# EAGLE board untitled (EAGLE 9.6.1)
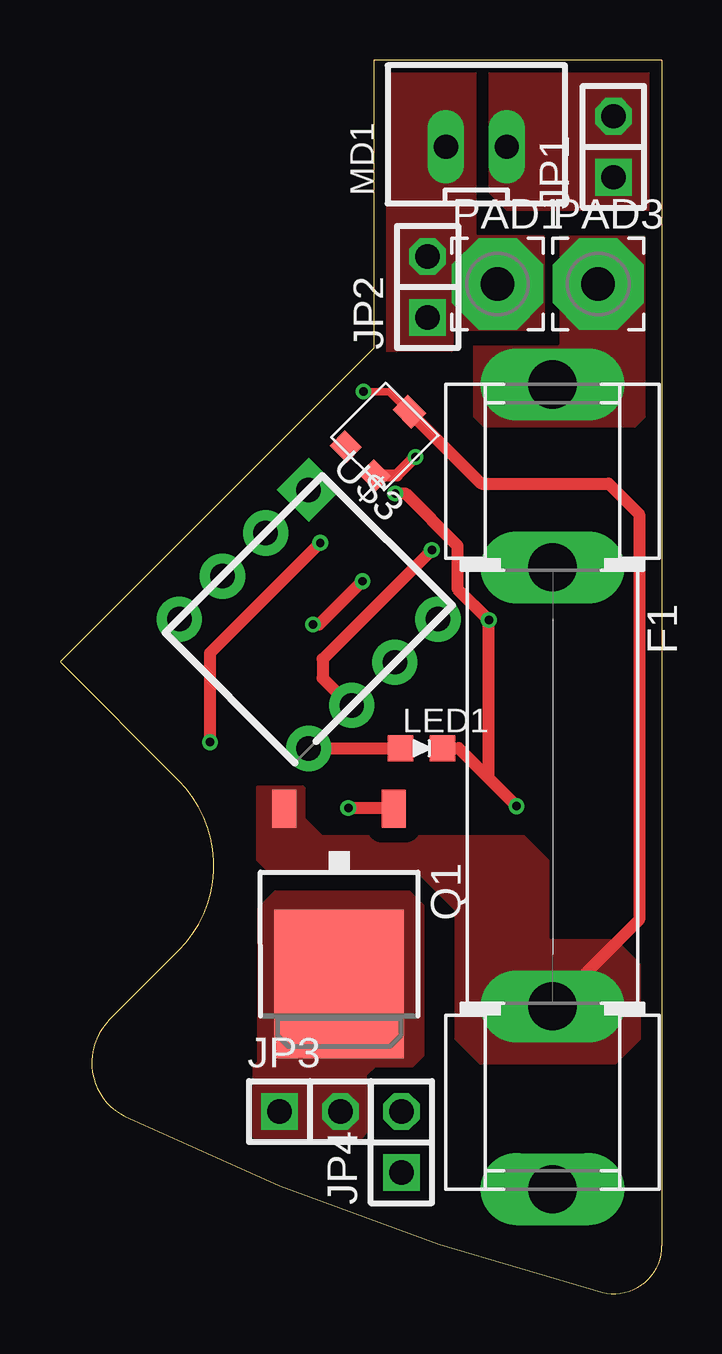
[diagram p0: board, top side]
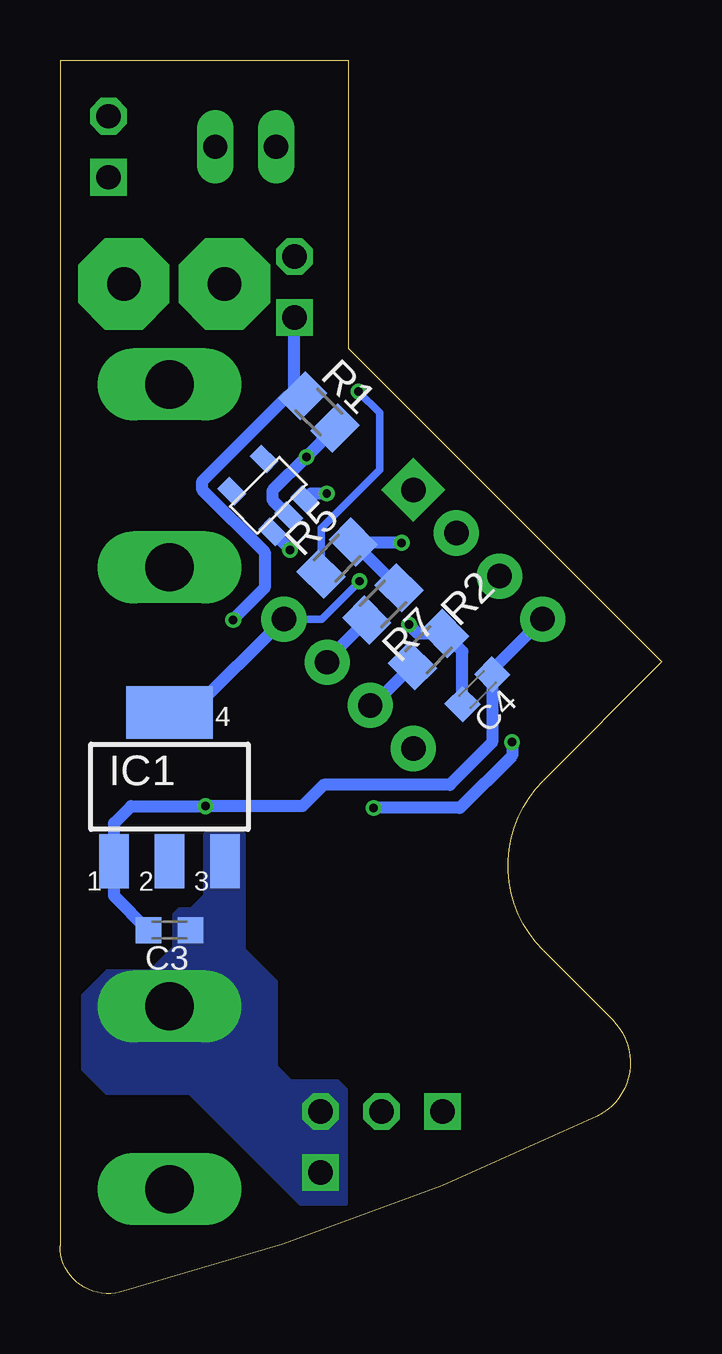
[diagram p1: board, bottom side, seen from below]

Size 25.08 x 51.4 mm. Coordinates in mm from the lower left corner, seen from the top.
Outline: 25.08,51.4 25.08,2 arc-104 22.59,0.06 arc-12 2.71,7.39 arc-109 2.06,11.41 4.95,14.3 arc90 4.95,21.37 0,26.32 13.08,39.4 13.08,51.4 25.08,51.4
Copper layers (1*16): Top 0.035mm / dielectric 1.6mm / Bottom 0.035mm
Design rules "Elecrow_2-layer_PCB_eagle_rule": minimum track width 6mil, minimum drill 12mil, track to track 6mil, track to pad 6mil, pad to pad 6mil, via to via 8mil, smd to smd 0mil, copper to edge 20mil, drill to drill 10mil, minimum pad ring 6mil, minimum via ring 6mil, stop-mask expansion 0mil, vias tented up to drill 100mil, thermal gap 10mil

## Footprints (pad centres in the part's own frame; a part is rotated, then mirrored left to right if it is on the bottom)
SMD1608 = smd 1.05 x 1.08: 1 -0.875,0; 2 0.875,0
SH32 = drill 2.007 long: 1A -16.764,0; 1B -9.144,0; 2A 9.144,0; 2B 16.764,0
SOT223 = smd 1.219 x 2.235: 1 -2.311,-3.099; 2 0,-3.099; 3 2.311,-3.099 | smd 3.6 x 2.2: 4 0,3.099
1X02 = drill 1.016 square: 1 -1.27,0 | drill 1.016 octagon: 2 1.27,0
LED1608 = smd 1.05 x 1.08: A -0.875,0; K 0.875,0
JST-XH-02-PACKAGE-LONG-PAD = drill 1.016 long: 1 -1.27,0; 2 1.27,0
3,81/1,4 = drill 1.397 pad 3.81 octagon: 1 0,0
TO252 = smd 1 x 1.6: 1 -2.28,-4.8; 2 2.28,-4.8 | smd 5.4 x 6.2: 3 0,2.5
M2012 = smd 1.3 x 1.6: 1 -0.95,0; 2 0.95,0
R3111N211A = smd 0.7 x 1: P$1 0,-1.2; P$2 0.95,-1.2; P$3 -0.95,-1.2; P$4 0.95,1.2; P$5 -0.95,1.2
SMD-R-TRIM = smd 1 x 0.9: P$1 0.85,-1.45; P$2 -0.85,-1.45 | smd 1.1 x 0.9: P$3 0,1.45
8P3 = drill 1.016 pad 1.88 square: 1 -3.81,3.81 | drill 1.016 pad 1.88: 2 -3.81,1.27; 3 -3.81,-1.27; 4 -3.81,-3.81; 5 3.81,-3.81; 6 3.81,-1.27; 7 3.81,1.27; 8 3.81,3.81

## Placement (x,y rotation side)
C3  0.1uF  [SMD1608]  20.52,15.15 180 bottom
C4  0.1uF  [SMD1608]  7.69,25.18 225 bottom
F1  [SH32]  20.52,21.12 270 top
IC1  317EMP  [SOT223]  20.52,21.12 0 bottom
JP1  [1X02]  23.06,47.79 90 top
JP2  [1X02]  15.31,41.94 90 top
JP3  [1X02]  10.41,7.58 0 top
JP4  [1X02]  14.22,6.31 90 top
LED1  LED1608  [LED1608]  15.06,22.72 0 top
MD1  JST-XH-02-PIN-LONG-PAD  [JST-XH-02-PACKAGE-LONG-PAD]  17.35,47.79 0 top
PAD1  [3,81/1,4]  18.24,42.07 0 top
PAD3  [3,81/1,4]  22.43,42.07 0 top
Q1  FDD4141TO252  [TO252]  11.63,15.4 180 top
R1  300Ω  [M2012]  14.3,36.74 315 bottom
R2  470kΩ  [M2012]  9.73,26.83 45 bottom
R5  10k  [M2012]  13.54,30.64 45 bottom
R7  300Ω  [M2012]  11.63,28.74 225 bottom
U$1  R3111N211A  [R3111N211A]  16.41,33.26 45 bottom
U$2  2.2kΩ  [SMD-R-TRIM]  13.54,35.72 315 top
U$3  ATTINY85  [8P3]  10.36,28.1 315 top

## Library data of the parts
C3 C4 LED1 = generic
F1 = fuse; MPN: 10207101009; OC_FARNELL: 811786; OC_NEWARK: 76R6904
IC1 = linear
JP1-JP4 = pinhead
MD1 = Rembrandt Electronics - JST XH Connectors v1-0
PAD1 PAD3 = wirepad
Q1 = transistor-fet
R1 R2 R5 R7 = adafruit
U$1 = R3111N211A
U$2 = by_hirame
U$3 = attiny85

## Nets
GND: C3.2 C4.1 IC1.1 JP2.1 JP2.2 LED1.K MD1.1 PAD1.1 R1.1 U$1.P$2 U$3.4
N$1: R1.2 U$1.P$1 U$2.P$1
N$2: Q1.1 R5.2 R7.1
N$3: F1.1A PAD3.1
N$4: R2.1 U$1.P$3 U$3.6
N$5: JP3.1 JP3.2 Q1.3
N$6: LED1.A U$3.5
N$7: JP1.1 JP1.2 MD1.2
N$10: R7.2 U$3.7
N$11: C4.2 IC1.4 R2.2 U$3.8
VCC: C3.1 F1.2A IC1.3 JP4.1 JP4.2 Q1.2 R5.1 U$2.P$3

## Tracks (layer width: path | path; a pad name or v marks a point on that pad's centre or on a via)
GND  (via drill 0.35)
  Top 0.508: v19.02,20.31 17.87,21.47 | 17.87,21.47 v17.87,28.07 16.56,29.38 16.56,31.16 14.38,33.34 v13.97,33.34 | LED1.K 16.61,22.72 17.87,21.47
  Bottom 0.508: JP2.1 15.31,37.75 R1.1 15.59,37.41 19.18,33.82 19.18,33.52 16.56,30.9 16.56,29.4 17.88,28.08 v17.87,28.07 | U$3.4 7.08,26 C4.1 7.08,22.96 8.84,21.2 14.1,21.2 14.99,20.31 v19.02,20.31 22.12,20.31 22.83,19.6 IC1.1 22.83,16.58 C3.2 | U$1.P$2 14.63,33.34 v13.97,33.34
  pour Top (no thermals): 17.27,47.72 17.27,44.54 17.27,44.03 20.07,44.03 20.14,44.03 20.14,42.36 20.14,40.17 16.33,40.17 16.33,39.31 14.48,39.31 13.23,39.31 13.23,49.52 13.23,52.09 16.74,52.09 17.27,52.09 17.27,50.13
N$1  (via drill 0.35)
  Top 0.508: U$2.P$1 14.04,34.09 v14.81,34.86
  Bottom 0.508: R1.2 13.63,36.05 v14.81,34.86 16.23,33.44 16.23,33.08 U$1.P$1
N$2  (via drill 0.35)
  Top 0.508: v10.85,31.28 6.25,26.69 v6.25,22.98 | v12.01,20.23 13.88,20.23 Q1.1
  Bottom 0.508: R7.1 R5.2 10.88,31.31 v10.85,31.28 | v6.25,22.98 6.25,22.42 8.43,20.23 v12.01,20.23
N$3
  pour Top (isolate 0.61, rank 3, no thermals): 20.6,44.01 20.6,39.84 20.52,39.77 17.55,39.77 17.27,39.49 17.27,36.57 17.68,36.16 23.95,36.16 24.33,36.54 24.33,44.01
N$4  (via drill 0.35)
  Top 0.508: v15.49,30.98 10.95,26.43 10.95,25.64 12.08,24.51 U$3.6
  Bottom 0.508: R2.1 12.05,24.51 U$3.6 | U$1.P$3 15.49,31 v15.49,30.98
N$5
  pour Top (isolate 0.61, no thermals): 8.1,6.54 12.57,6.54 12.73,6.7 12.73,9.11 13.11,9.49 14.68,9.49 15.11,9.92 15.11,16.17 14.55,16.73 8.97,16.73 8.28,16.04 8.28,9.64 8.1,9.46 8.1,7.13
N$6
  Top 0.508: U$3.5 14.18,22.71 LED1.A
N$7
  pour Top (rank 2, no thermals): 26.67,52.8 17.92,52.8 17.92,45.89 18.63,45.18 25.67,45.18 26.67,46.18
N$10
  Bottom 0.508: R7.2 13.95,26.41 U$3.7
N$11  (via drill 0.35)
  Top 0.508: v10.54,27.88 10.79,27.88 v12.6,29.68
  Bottom 0.305: v12.6,29.68 14.18,28.1 U$3.8
  Bottom 0.508: C4.2 8.31,26.76 R2.2 10.16,27.5 v10.54,27.88 | U$3.8 19.64,24.21 IC1.4
VCC  (via drill 0.35)
  Top 0.305: v12.65,37.58 13.72,37.58 U$2.P$3
  Top 0.508: U$2.P$3 17.56,33.75 22.86,33.75 24.13,32.48 24.13,15.58 F1.2A
  Bottom 0.305: R5.1 14.21,31.88 11.76,34.33 11.76,36.69 v12.65,37.58
  pour Bottom (isolate 0.254, no thermals): 13.16,3.75 15.08,3.75 19.68,8.35 23.13,8.35 24.13,9.35 24.13,12.43 23.13,13.43 21.32,13.43 20.32,14.43 20.32,15.81 20.12,16.02 19.63,16.02 19.05,16.6 19.05,19.14 18.87,19.32 17.58,19.32 17.42,19.17 17.42,14.34 16.08,12.99 16.08,9.46 15.47,8.85 13.51,8.85 13.16,8.5
  pour Top (isolate 0.61, no thermals): 8.23,21.1 8.23,18.07 8.74,17.57 14.94,17.57 15.67,16.83 16.51,15.99 16.51,10.89 16.51,10.62 17.51,9.62 21.59,9.62 23.13,9.62 24.13,10.62 24.13,13.43 24.13,13.7 23.13,14.7 20.32,14.7 20.32,18.04 19.32,19.04 12.88,19.04 10.9,19.04 10.16,19.78 10.16,21.05 10.11,21.1